# Altium PCB PCB3.PcbDoc
Units mm, origin at the board's own origin, x right, y up, seen from the top; angles counter-clockwise.
Board outline 83.75 x 55 mm, 2 copper layers (Top Layer, Bottom Layer); 54 components, 54 nets, 287 pads, 43 vias.
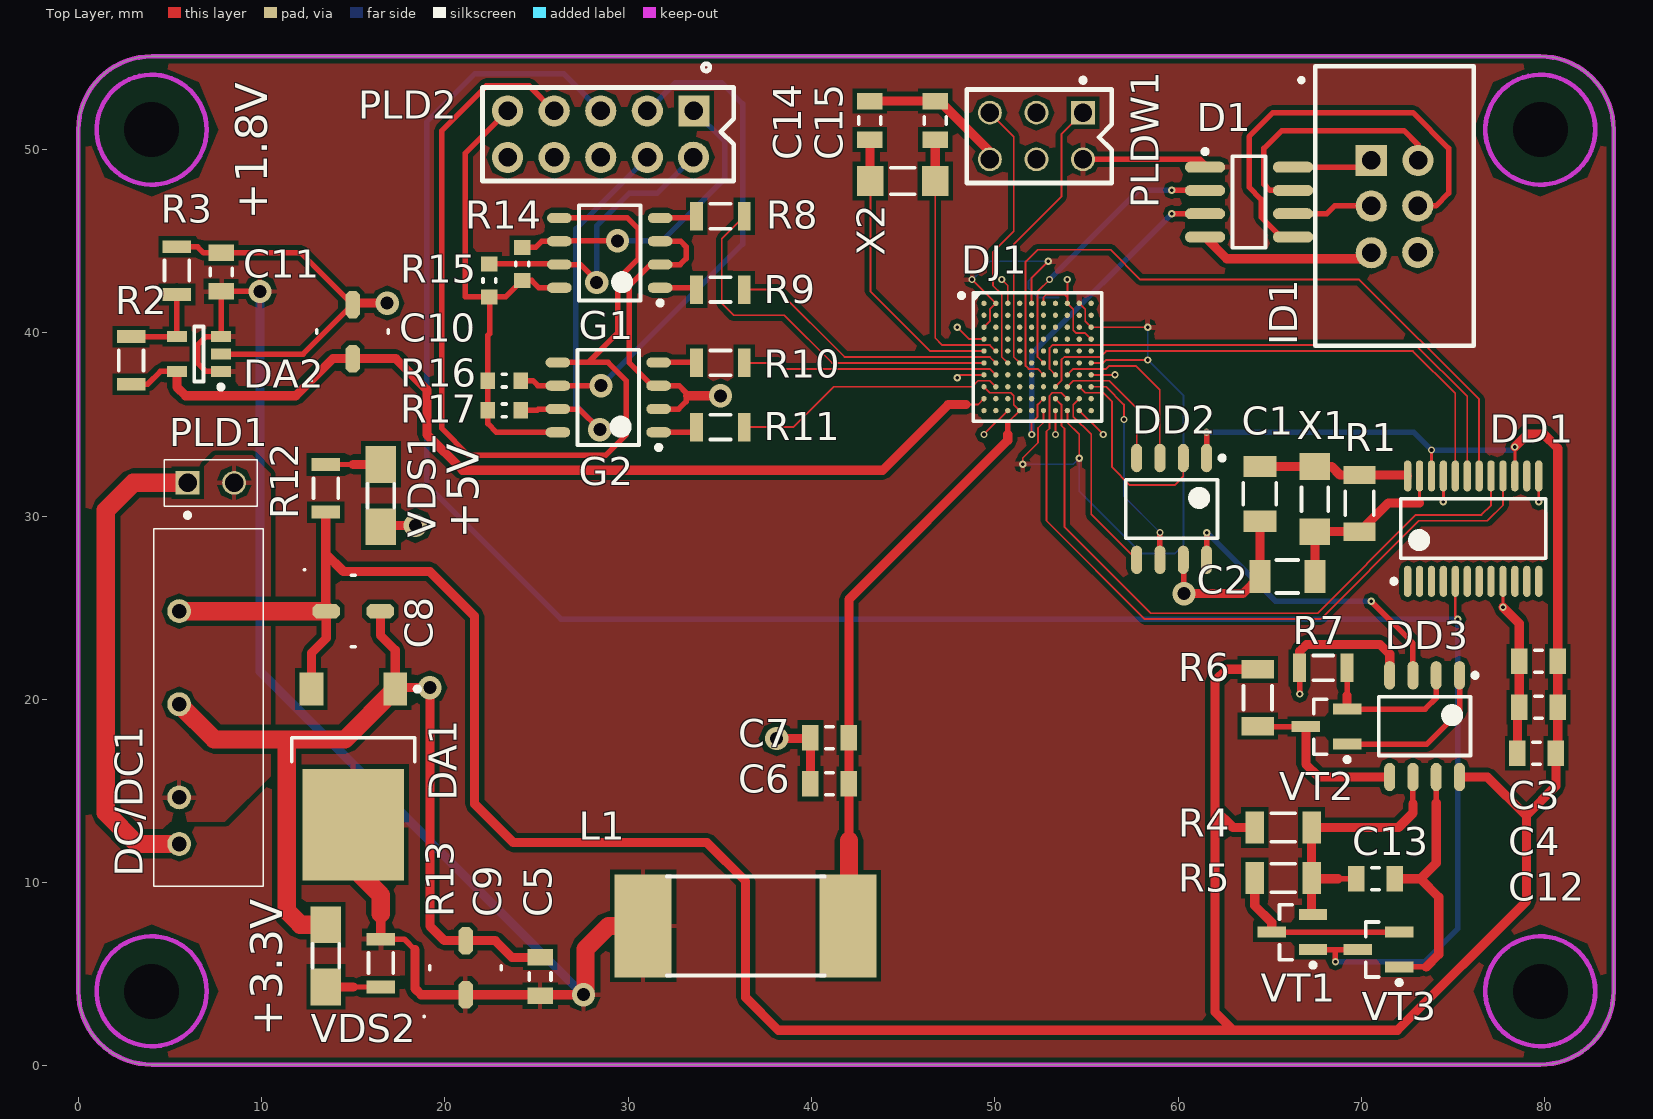
[diagram p0: Top Layer view]
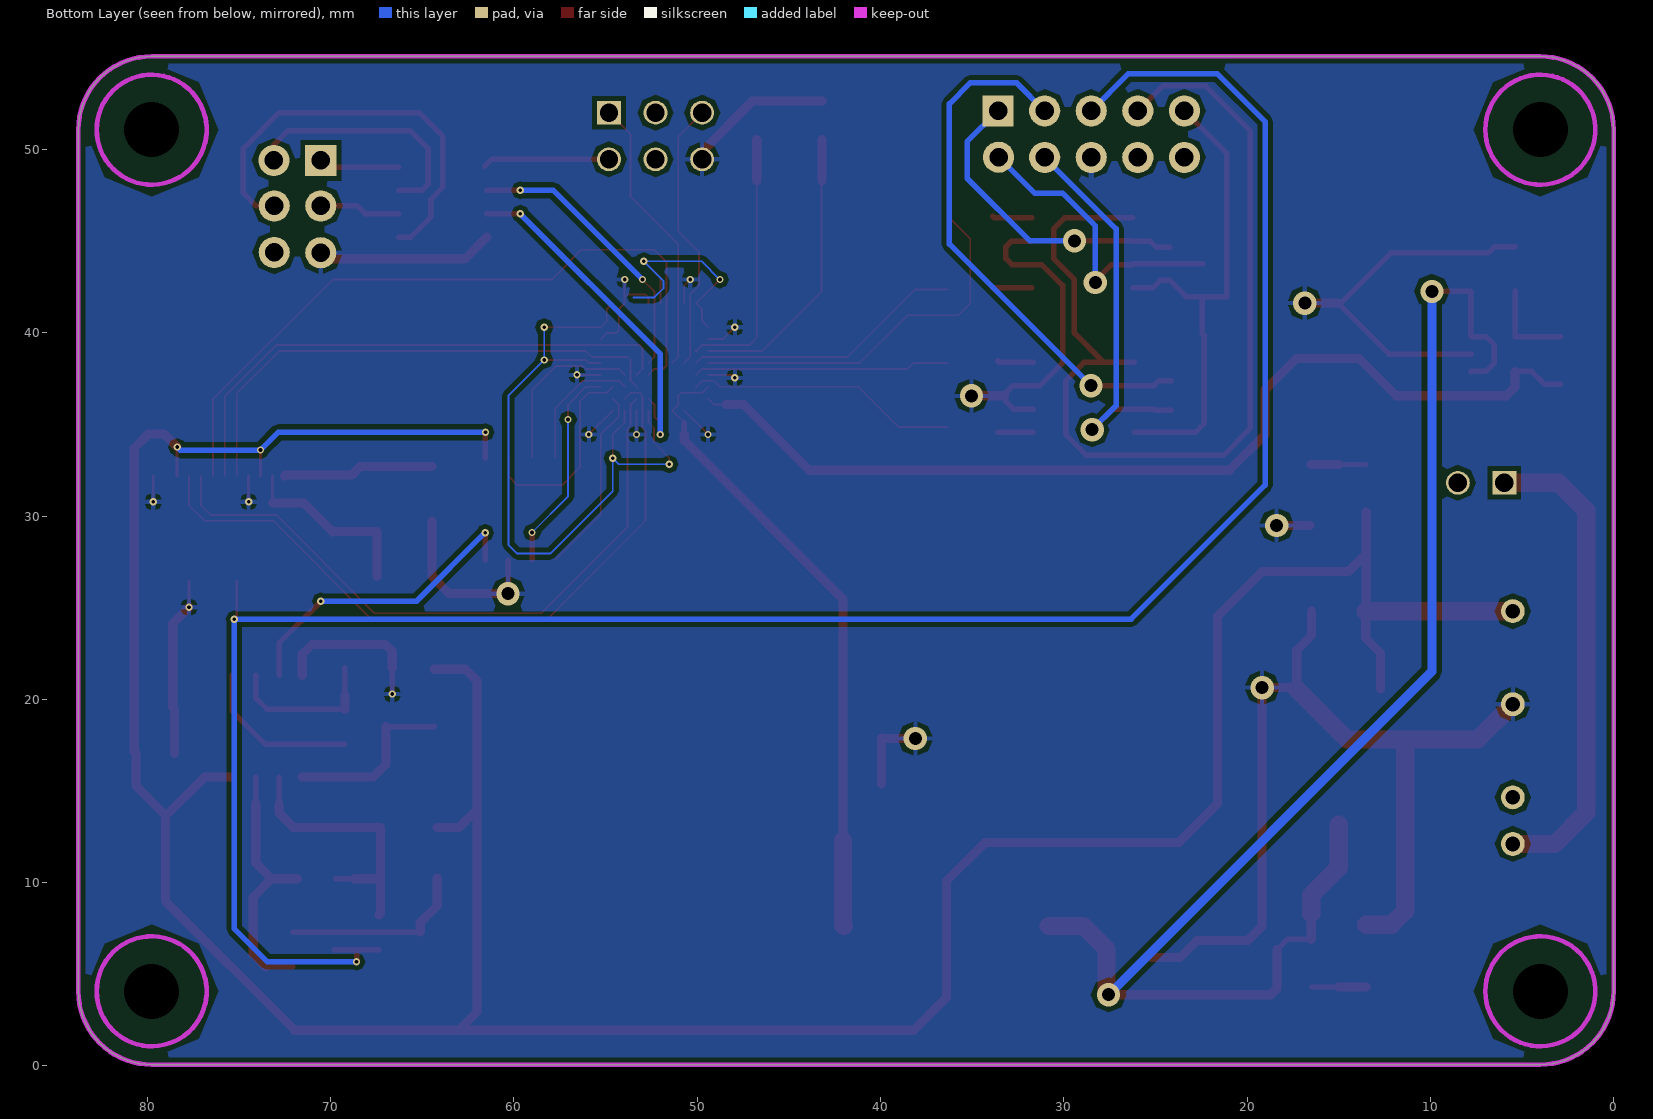
[diagram p1: Bottom Layer view, seen from below]

## Layer stack, top to bottom
Top Solder: solder mask 0.0102, Solder Resist, Dk 3.5
Top Layer: signal copper 0.0356
Dielectric 1: dielectric 0.32, FR-4, Dk 4.8
Bottom Layer: signal copper 0.0356
Bottom Solder: solder mask 0.0102, Solder Resist, Dk 3.5

## Board outline
0,4.075 0,51.075 cw(c4,51.075) 4,55.075 79.75,55.075 cw(c79.75,51.075) 83.75,51.075 83.75,4.075 cw(c79.75,4.075) 79.75,0.075 4,0.075 cw(c4,4.075)

## Design rules (kind name [scope] priority, off if disabled: settings)
Clearance [All] p1: gap=0.254 ignorepadtopadclearanceinfootprint=FALSE except(0: Arc-Hole Track-Hole SMDPad-Hole THPad-Hole Via-Hole Fill-Hole Poly-Hole Region-Hole Text-Hole; 0.1: Arc-Arc Arc-Track Arc-SMDPad Arc-Via Track-Track Track-SMDPad Track-Via Via-Via)
PolygonConnect [All] p1: connectstyle=Relief reliefconductorwidth=0.254 reliefentries=4 polygonreliefangle="90 Angle" airgapwidth=0.254
RoomDefinition Sheet4 [InComponentClass('Sheet4')] p1: confinementstyle=ConfineIn formatcopy=TRUE lockcomponents=FALSE outline 0,8.5 8,8.5 8,0 0,0
RoutingVias [All] p1: holewidth=0.711 width=1.27 viastyle="Through Hole" minholewidth=0.2 minwidth=0.3 maxholewidth=0.711 maxwidth=1.27
SolderMaskExpansion [All] p1: expansion=0.102
Width [All] p1: maxlimit=2 minlimit=0.1 preferedwidth=0.3
30 further rules are at their usual default settings.

## Components (designator, comment, footprint, x,y, rotation, side; value= is the part's Value field where it differs from the comment)
C1 "33pF" "CAP 1206" 64.45,31.213 r270 top
C2 "33pF" "CAP 1206" 65.95,26.7 r180 top
C3 "100pF" "CAP 0805" 79.65,22.075 r180 top
C4 "100nF" "CAP 0805" 79.65,19.575 r180 top
C5 "100nF" "CAP 0805" 25.188,4.875 r270 top
C6 "100nF" "CAP 0805" 40.987,15.4 r0 top
C7 "100nF" "CAP 0805" 40.987,17.9 r0 top
C8 "10mF" "CAP 10MF ELECTROLIT" 15,24.813 r0 top
C9 "10mF" "CAP 10MF ELECTROLIT" 21.125,5.362 r90 top
C10 "10mF" "CAP 10MF ELECTROLIT" 14.963,40.063 r90 top
C11 "100nF" "CAP 0805" 7.8,43.3 r270 top
C12 "100pF" "CAP 0805" 79.55,17.063 r0 top
C13 "100pF" "CAP 0805" 70.763,10.213 r0 top
C14 "16pF" "CAP 0805" 43.165,51.587 r270 top
C15 "16pF" "CAP 0805" 46.74,51.588 r270 top
D1 "ADM3488" ADM3488 63.863,47.125 r0 top
DA1 "" MC33269 15,15.813 r270 top
DA2 "" MIC5205-ADJ 6.575,38.837 r180 top
DC/DC1 "" "TRACO POWER" 10.1,9.812 r90 top
DD1 "AD7709" "AD7709 TSSOP24" 76.087,29.313 r90 top
DD2 "AD8300" SOIC8 59.638,30.388 r270 top
DD3 "OP284" SOIC8 73.438,18.538 r270 top
DJ1 "ATXMEGA128A1" ATXMEGA128A1 52.325,38.675 r0 top
G1 "" "HCPL-0600/01/11/30/31/61 (HCPL-0631-000E)" 28.988,44.355 r180 top
G2 "" "HCPL-0600/01/11/30/31/61 (HCPL-0631-000E)" 28.907,36.472 r180 top
ID1 "IDC6" "IDC 6" 71.795,46.92 r270 top
L1 "" "IND 10 MHE" 36.4,7.638 r0 top
PLD1 "" "PLS 2" 4.69,30.543 r0 top
PLD2 "PLD 10" "PLD 10" 34.848,53.372 r180 top
PLDW1 "PLD 6 SPI" "PLD 6 SPI" 56.075,53.27 r180 top
R1 "1MOm" "RES 1206" 69.887,30.687 r90 top
R2 "220kOm" "RES 0805" 2.875,38.488 r270 top
R3 "100kOm" "RES 0805" 5.375,43.387 r270 top
R4 "51Om" "RES 1206" 65.725,13.013 r180 top
R5 "10kOm" "RES 1206" 65.725,10.25 r0 top
R6 "2.37kOm" "RES 1206" 64.337,20.088 r90 top
R7 "4.7kOm" "RES 0805" 67.912,21.713 r0 top
R8 "" "RES 0805" 35.025,46.35 r0 top
R9 "" "RES 0805" 35.025,42.35 r0 top
R10 "" "RES 0805" 35.025,38.35 r0 top
R11 "" "RES 0805" 35.025,34.85 r0 top
R12 "110Om" "RES 0805" 13.5,31.512 r270 top
R13 "27Om" "RES 0805" 16.5,5.613 r270 top
R14 "1kOm" "CAP 0603" 24.213,43.75 r270 top
R15 "1kOm" "CAP 0603" 22.425,42.85 r270 top
R16 "1kOm" "CAP 0603" 23.238,37.387 r180 top
R17 "1kOm" "CAP 0603" 23.238,35.762 r180 top
VDS1 "2.8V 20mA" "Под диод (5ммх2мм)" 15.3,34.012 r270 top
VDS2 "2.8V 20mA" "Под диод (5ммх2мм)" 14.7,3.113 r90 top
VT1 "2Т664А9" 2Т3129Б9 66.225,7.3 r180 top
VT2 "2Т3130Б9" 2Т3129Б9 68.088,18.513 r180 top
VT3 "2Т3129Б9" 2Т3129Б9 70.925,6.35 r180 top
X1 "32.768kHz" KVARZ 67.45,30.925 r90 top
X2 "32.768kHz" KVARZ 44.978,48.275 r0 top

## Footprints (in the part's own frame and the unit in brackets; to place one, negate y for a bottom-side part, rotate by r counter-clockwise, add the part's x,y. Pads: shape width x height; smd on the part's side, far side on the other; paste and mask are expansions set on the pad)
2Т3129Б9 [mm]
  rect 1.55x0.6 smd: 1(-1.125,0.95) 2(1.125,0) 3(-1.125,-0.95)
  silkscreen extent -1.25,-1.5 0.7,1.92, body extent -0.7,-1.5 0.7,1.5, height 1
"AD7709 TSSOP24" [mm]
  oval 1.7x0.4 smd: 1(-2.875,3.575) 2(-2.875,2.925) 3(-2.875,2.275) 4(-2.875,1.625) 5(-2.875,0.975) 6(-2.875,0.325) 7(-2.875,-0.325) 8(-2.875,-0.975) 9(-2.875,-1.625) 10(-2.875,-2.275) 11(-2.875,-2.925) 12(-2.875,-3.575) 13(2.875,-3.575) 14(2.875,-2.925) 15(2.875,-2.275) 16(2.875,-1.625) 17(2.875,-0.975) 18(2.875,-0.325) 19(2.875,0.325) 20(2.875,0.975) 21(2.875,1.625) 22(2.875,2.275) 23(2.875,2.925) 24(2.875,3.575)
  silkscreen extent -3,-3.95 1.63,4.45, body extent -2.25,-3.95 2.25,3.95, height 1.2
ADM3488 [mm] "SOIC, 8-Leads, Body 4,90x3,90mm, Pitch 1,27mm, IPC Medium Density"
  oval 2.2x0.6 smd: 1(-2.4,1.905) 2(-2.4,0.635) 3(-2.4,-0.635) 4(-2.4,-1.905) 5(2.4,-1.905) 6(2.4,-0.635) 7(2.4,0.635) 8(2.4,1.905)
  silkscreen extent -2.52,-2.5 0.9,2.88, body extent -2,-2.5 2,2.5, height 1.75
ATXMEGA128A1 [mm] "BGA, 100-Leads, Body 7,00x7,00mmx1,00mm, Pitch 0,65mm"
  round 0.29 smd: A1(-2.925,2.925) A2(-2.275,2.925) A3(-1.625,2.925) A4(-0.975,2.925) A5(-0.325,2.925) A6(0.325,2.925) A7(0.975,2.925) A8(1.625,2.925) A9(2.275,2.925) A10(2.925,2.925) B1(-2.925,2.275) B2(-2.275,2.275) B3(-1.625,2.275) B4(-0.975,2.275) B5(-0.325,2.275) B6(0.325,2.275) B7(0.975,2.275) B8(1.625,2.275) B9(2.275,2.275) B10(2.925,2.275) C1(-2.925,1.625) C2(-2.275,1.625) C3(-1.625,1.625) C4(-0.975,1.625) C5(-0.325,1.625) C6(0.325,1.625) C7(0.975,1.625) C8(1.625,1.625) C9(2.275,1.625) C10(2.925,1.625) D1(-2.925,0.975) D2(-2.275,0.975) D3(-1.625,0.975) D4(-0.975,0.975) D5(-0.325,0.975) D6(0.325,0.975) D7(0.975,0.975) D8(1.625,0.975) D9(2.275,0.975) D10(2.925,0.975) E1(-2.925,0.325) E2(-2.275,0.325) E3(-1.625,0.325) E4(-0.975,0.325) E5(-0.325,0.325) E6(0.325,0.325) E7(0.975,0.325) E8(1.625,0.325) E9(2.275,0.325) E10(2.925,0.325) F1(-2.925,-0.325) F2(-2.275,-0.325) F3(-1.625,-0.325) F4(-0.975,-0.325) F5(-0.325,-0.325) F6(0.325,-0.325) F7(0.975,-0.325) F8(1.625,-0.325) F9(2.275,-0.325) F10(2.925,-0.325) G1(-2.925,-0.975) G2(-2.275,-0.975) G3(-1.625,-0.975) G4(-0.975,-0.975) G5(-0.325,-0.975) G6(0.325,-0.975) G7(0.975,-0.975) G8(1.625,-0.975) G9(2.275,-0.975) G10(2.925,-0.975) H1(-2.925,-1.625) H2(-2.275,-1.625) H3(-1.625,-1.625) H4(-0.975,-1.625) H5(-0.325,-1.625) H6(0.325,-1.625) H7(0.975,-1.625) H8(1.625,-1.625) H9(2.275,-1.625) H10(2.925,-1.625) J1(-2.925,-2.275) J2(-2.275,-2.275) J3(-1.625,-2.275) J4(-0.975,-2.275) J5(-0.325,-2.275) J6(0.325,-2.275) J7(0.975,-2.275) J8(1.625,-2.275) J9(2.275,-2.275) J10(2.925,-2.275) K1(-2.925,-2.925) K2(-2.275,-2.925) K3(-1.625,-2.925) K4(-0.975,-2.925) K5(-0.325,-2.925) K6(0.325,-2.925) K7(0.975,-2.925) K8(1.625,-2.925) K9(2.275,-2.925) K10(2.925,-2.925)
  silkscreen extent -4.27,-3.5 3.5,3.5, body extent -3.5,-3.5 3.5,3.5, height 1
"CAP 10MF ELECTROLIT" [mm]
  oct 1.5x0.8 smd: 1(-1.475,0) 2(1.475,0)
  silkscreen extent -2.71,-1.95 0.1,2.31, body extent -2,-2 2,2, height 5.4
"CAP 0603" [mm]
  rect 0.8x0.9 smd: 1(-0.9,0) 2(0.9,0)
  silkscreen extent -0.1,-0.35 0.1,0.35, body extent -0.8,-0.4 0.8,0.4, height 0.9
"CAP 0805" [mm]
  rect 0.9x1.4 smd: 1(-1.05,0) 2(1.05,0)
  silkscreen extent -0.2,-0.6 0.2,0.6, body extent -1,-0.63 1,0.63, height 1.3
"CAP 1206" [mm]
  rect 1.15x1.8 smd: 1(-1.5,0) 2(1.5,0)
  silkscreen extent -0.6,-0.9 0.6,0.9
"HCPL-0600/01/11/30/31/61 (HCPL-0631-000E)" [mm] "Small-Outline SO-8 Package (HCPL-0600/01/11/30/31/61)"
  oval 1.35x0.55 smd: 1(-2.75,1.905) 2(-2.75,0.635) 3(-2.75,-0.635) 4(-2.75,-1.905) 5(2.75,-1.905) 6(2.75,-0.635) 7(2.75,0.635) 8(2.75,1.905)
  silkscreen extent -2.88,-2.6 1.68,2.85, body extent -2.05,-2.6 2.05,2.6, height 3.3
"IDC 6" [mm]
  rect 1.7x1.7 hole 1: 1(-2.48,-1.27)
  round 1.7 hole 1: 2(-2.48,1.29) 3(0,-1.27) 4(0,1.27) 5(2.56,-1.27) 6(2.54,1.27)
  silkscreen extent -7.62,-5.18 7.64,4.32, body extent -7.61,-4.4 7.61,4.4, height 9
"IND 10 MHE" [mm]
  rect 3.1x5.6 smd: 1(-5.59,0) 2(5.59,0)
  silkscreen extent -4.3,-2.7 4.3,2.7, body extent -6,-6 6,6, height 0.6
KVARZ [mm]
  rect 1.45x1.65 smd: 1(-1.775,0) 2(1.775,0)
  silkscreen extent -0.65,-0.72 0.65,0.72, body extent -2.1,-0.8 2.1,0.8, height 0.85
MC33269 [mm] "D-PAK, 3-Pads, Body 6,27x6,73mm (max), IPC Medium Density"
  rect 1.8x1.3 smd: 1(-4.75,2.29) 3(-4.75,-2.29)
  rect 6.1x5.55 smd: 4(2.65,0)
  silkscreen extent -4.87,-3.35 -0.8,3.62, body extent -2.1,-3.37 4.25,3.37, height 0.58
MIC5205-ADJ [mm] "SOT23, 5-Leads, Body 2,91x2,80mm, Pitch 0,95mm, IPC Medium Density"
  rect 1.1x0.6 smd: 1(-1.2,0.95) 2(-1.2,0) 3(-1.2,-0.95) 4(1.2,-0.95) 5(1.2,0.95)
  silkscreen extent -1.33,-1.5 0.25,1.92, body extent -0.87,-1.51 0.87,1.51, height 1.45
"PLD 6 SPI" [mm]
  rect 1.3x1.3 hole 1: 1(1.27,1.27)
  round 1.3 hole 1: 2(1.27,3.81) 3(3.81,1.27) 4(3.81,3.81) 5(6.35,1.27) 6(6.35,3.81)
  silkscreen extent -0.3,-0.62 7.62,5.1, body extent 0,0.04 7.62,5.04, height 8.8
"PLD 10" [mm]
  rect 1.7x1.7 hole 1: 1(1.27,1.27)
  round 1.7 hole 1: 2(1.3,3.8) 3(3.81,1.27) 4(3.81,3.81) 5(6.35,1.27) 6(6.35,3.81) 7(8.89,1.27) 8(8.89,3.81) 9(11.43,1.27) 10(11.43,3.81)
  silkscreen extent -0.9,-1.3 12.8,5.1
"PLS 2" [mm]
  rect 1.3x1.3 hole 1: 1(1.27,1.27)
  round 1.3 hole 1: 2(3.81,1.27)
  silkscreen extent 0,-0.62 5.08,2.54, body extent 0.04,0 5.04,2.54, height 8.8
"RES 0805" [mm]
  rect 0.7x1.55 smd: 1(-1.3,0) 2(1.3,0)
  silkscreen extent -0.55,-0.67 0.55,0.67, body extent -1,-0.6 1,0.6, height 0.5
"RES 1206" [mm]
  rect 1x1.75 smd: 1(-1.55,0) 2(1.55,0)
  silkscreen extent -0.65,-0.77 0.65,0.77, body extent -1.6,-0.85 1.6,0.85, height 0.6
SOIC8 [mm] "SOIC, 8-Leads, Body 5,00x4,00mm, Pitch 1,27mm, IPC Medium Density"
  oval 1.55x0.6 smd: 1(-2.775,1.905) 2(-2.775,0.635) 3(-2.775,-0.635) 4(-2.775,-1.905) 5(2.775,-1.905) 6(2.775,-0.635) 7(2.775,0.635) 8(2.775,1.905)
  silkscreen extent -2.9,-2.5 1.6,2.88
"TRACO POWER" [mm]
  round 1.3 hole 0.8: 1(2.3,4.6) 2(4.84,4.6) 4(9.92,4.6) 6(15,4.6)
  silkscreen extent 0,0 19.5,6
"Под диод (5ммх2мм)" [mm]
  rect 2x1.65 smd: 1(1.2,1.2) 2(4.6,1.2)
  silkscreen extent 2.25,0.48 3.55,1.93, body extent 0.8,0.4 5,2, height 0.85

## Part data
C1 C2: library part "Cap 33pF"
C3: library part "Cap 100 pF"
C4 C5 C6 C7 C11: library part "cap 100nF"
C8 C9 C10: library part "Cap 10mF electrolit"
C12 C13: library part "Cap 100pF"
C14 C15: library part "Cap 22pF"
DA1: library part MC33269
DA2: library part MIC5205-ADJ
DC/DC1: library part "TRACO POWER(5V)"
G1 G2: library part Оптопара
L1: library part "Ind 10 mHe"
PLD1: library part "PLS 2"
R1: library part "RES 1MOm"
R2 R3: library part "Res 100kOm"
R4: library part "RES 51Om"
R5: library part "RES 10kOm SMD1206"
R6: library part "RES 2.37kOm"
R7: library part "RES 4.6kOm"
R8 R9 R10 R11: library part "Res 100 Om"
R12: library part "Res 110Om"
R13: library part "Res 25Om"
R14 R15 R16 R17: library part "Res 1kOm"
VDS1 VDS2: library part Светодиод

## Free pads (board coordinates)
  round 0 hole 3: m/h(4,4.075) m/h(4,51.075) m/h(79.75,4.075) m/h(79.75,51.075)

## Via types
v1: diameter 0.4, hole 0.2, Top Layer to Bottom Layer, 31 vias
v2: diameter 1.27, hole 0.711, Top Layer to Bottom Layer, 12 vias

## Nets (pads, with @x,y where several pads share a name; then routed paths per layer and width w, separated by ;. In a path a pad name is that pad's centre, name@x,y a point inside that pad or via, vN(x,y) a via of type N, cw(c..) or ccw(c..) an arc to the next point about the centre after c; other vN are vias at no path point)
+5V: C3.1 C4.1 C8.1 C12.2 DA1.3 DC/DC1.6 DD1.15 DD1.22 DD2.1 DD3.8 R4.2 R6.2 R12.2 | length 186.1
  Top Layer w0.15: DD1.22 v1(73.812,33.6) ; DD1.15 v1(78.362,33.763)
  Top Layer w0.3: DD2.1 v1(61.543,34.575)
  Top Layer w0.5: DA1.3 12.71,22.523 13.525,23.338 C8.1 13.5,24.838 13.5,27.938 ; 13.487,27.95 13.5,27.938 ; R12.2 13.5,27.938 ; R4.2 62.987,13.013 62,14 ; R6.2 62.638,21.638 62,21 62,14 ; DD3.8 76.863,15.762 78.975,13.65 ; v1(78.362,33.763) 79.075,34.475 79.925,34.475 80.7,33.7 C3.1 C4.1 80.7,17.162 C12.2 80.6,15.275 79,13.675 79,9 71.95,1.95 63,1.95 ; 13.5,27.938 14.462,26.975 19.175,26.975 21.612,24.537 21.612,14.3 23.725,12.187 34.288,12.187 36.4,10.075 36.4,3.737 38.187,1.95 63,1.95 ; 62,14 62,2.95 63,1.95
  Top Layer w1: DC/DC1.6 C8.1
  Bottom Layer w0.3: v1(61.543,34.575) 72.837,34.575 v1(73.812,33.6) 78.2,33.6 v1(78.362,33.763)
"+5V (Dirty)": DC/DC1.1 PLD1.1 | length 26.3
  Top Layer w1: DC/DC1.1 3.2,12.113 1.5,13.813 1.5,30.312 3,31.812 PLD1.1
AVCC: C6.2 C7.2 DJ1.H1 DJ1.K4 L1.2 | length 34.8
  Top Layer w0.1: DJ1.H1 49.725,36.725 50.862,36.725 51.025,36.562 51.025,36.075 DJ1.K4 50.7,35.1
  Top Layer w0.3: 50.7,34.45 50.7,35.1
  Top Layer w0.5: 42.038,12.3 C6.2 C7.2 42.037,25.462 50.7,34.125 50.7,34.45
  Top Layer w1: L1.2 42.038,7.685 42.038,12.3
CLR2: DD2.6 DJ1.H10 | length 11.5
  Top Layer w0.1: DJ1.H10 56.062,37.05 57.038,36.075 v1(57.038,35.262)
  Top Layer w0.3: DD2.6 v1(59.003,29.102)
  Bottom Layer w0.1: v1(57.038,35.262) 57.038,31.067 v1(59.003,29.102)
CP: DJ1.F2 R9.2 | length 15.4
  Top Layer w0.1: R9.2 38.125,42.35 41.8,38.675 49.725,38.675 DJ1.F2
Data: DJ1.F1 R8.2 | length 20.9
  Top Layer w0.1: R8.2 35.1,45.125 35.1,41.6 35.75,40.95 38.512,40.95 41.112,38.35 DJ1.F1
EO: DJ1.H2 R11.2 | length 14.9
  Top Layer w0.1: R11.2 39,34.85 41.2,37.05 48.75,37.05 49.075,37.375 49.725,37.375 DJ1.H2
GND: C1.2 C2.2 C3.2 C4.2 C5.1 C6.1 C7.1 C8.2 C9.2 C10.2 C11.1 C12.1 C14.1 C15.1 D1.4 DA1.1 DA2.2 DC/DC1.4 DD1.9 DD1.13 DD1.21 DD2.7 DD3.4 DJ1.A3 DJ1.A6 DJ1.A8 DJ1.D1 DJ1.D10 DJ1.G1 DJ1.G10 DJ1.K3 DJ1.K7 DJ1.K9 G1.2 G1.3 G2.2 G2.3 ID1.5 PLD2.6 PLDW1.6 R3.1 R7.1 VDS1.2 VDS2.2 | length 162.4
  Top Layer w0.1: v1(47.937,37.538) 48.1,37.7 DJ1.G1 ; v1(47.937,40.3) 48.587,39.65 DJ1.D1 ; v1(49.4,34.45) DJ1.K3 ; v1(50.375,42.9) 50.7,42.575 DJ1.A3 ; DJ1.A6 52.65,41.925 52.812,42.088 53.787,42.088 53.95,41.925 DJ1.A8 ; v1(53.3,34.45) DJ1.K7 ; v1(53.95,42.9) DJ1.A8 ; DJ1.K9 v1(55.9,34.45) ; DJ1.G10 v1(56.55,37.7) ; DJ1.D10 54.925,39.975 54.438,39.975 54.275,40.138 54.275,41.275 DJ1.A8
  Top Layer w0.15: v1(74.463,30.775) DD1.21 ; v1(77.713,25.025) DD1.9 ; v1(79.663,30.775) DD1.13
  Top Layer w0.3: R3.1 6.5,44.687 6.838,44.35 C11.1 12.15,44.35 C10.2 12.262,38.837 DA2.2 ; G2.2 32.75,35.837 33.15,36.238 33.15,36.725 32.768,37.107 G2.3 31.305,37.107 30.063,38.35 30.063,42.575 31.208,43.72 G1.2 32.83,43.72 33.15,44.04 33.15,44.688 32.848,44.99 G1.3 ; v2(60.31,25.765) DD2.7@60.31,27.575 ; v1(66.623,20.288) R7.1@66.623,21.723
  Top Layer w0.5: C10.2@15.038,41.613 v2(16.848,41.613) ; C8.2 16.475,23.5 17.29,22.685 DA1.1 17.365,20.638 v2(19.175,20.638) 19.175,7.637 19.975,6.837 C9.2 22.738,6.837 23.65,5.925 C5.1 ; VDS1.2@16.575,29.487 v2(18.385,29.487) ; 33.225,36.556 v2(35.035,36.556) ; v2(38.09,17.862) C7.1@39.9,17.862 ; C6.1 C7.1 ; C14.1 C15.1 46.975,52.638 49.725,49.887 PLDW1.6 ; v2(60.31,25.765) 63.515,25.765 C2.2 C1.2 ; D1.4 62.645,44.037 70.202,44.037 ID1.5 ; R7.1 66.623,21.723 66.623,22.622 67,23 71,23 71.532,22.468 DD3.4 ; v1(77.713,25.025) 78.6,24.137 C3.2 C4.2 ; C12.1 78.5,19.475 C4.2
  Top Layer w1: DC/DC1.4 7.42,17.812 11.375,17.812 ; VDS2.2 12.112,7.713 11.375,8.45 11.375,17.812 ; DA1.1 14.54,17.812 11.375,17.812
GND(Dirty): DC/DC1.2 PLD1.2
LD2: DD2.5 DJ1.J9 | length 10.4
  Top Layer w0.1: DJ1.J9 54.275,36.075 54.275,35.425 55.25,34.45 55.25,30.095 DD2.5
MISO1: DD1.19 DJ1.G7 | length 29.9
  Top Layer w0.1: DJ1.G7 52.975,38.025 52.975,39.163 53.137,39.325 72.962,39.325 75.762,36.525 DD1.19
MOSI1: DD1.20 DJ1.H7 | length 28.7
  Top Layer w0.1: DJ1.H7 53.625,37.375 53.625,38.513 53.787,38.675 55.737,38.675 56.062,39 72.8,39 75.113,36.687 DD1.20
MOSI2: DD2.4 DJ1.H8 | length 7.2
  Top Layer w0.1: DJ1.H8 54.275,37.375 56.225,37.375 57.733,35.868 DD2.4
NetC1_1: C1.1 DD1.24 R1.2 X1.2 | length 8.3
  Top Layer w0.5: C1.1@64.45,32.7 X1.2 68.363,32.7 68.825,32.238 R1.2 72.463,32.238 DD1.24
NetC2_1: C2.1 DD1.23 R1.1 X1.1 | length 10.3
  Top Layer w0.15: 73.163,30.712 DD1.23
  Top Layer w0.5: C2.1 X1.1 69.875,29.15 R1.1 71.463,30.712 73.163,30.712
NetC13_1: C13.1 DD3.6 R4.1 R5.2 VT1.3 | length 15.1
  Top Layer w0.3: 68.713,10.212 C13.1 ; 72.802,14.302 DD3.6
  Top Layer w0.5: VT1.3 67.275,8.325 R5.2 ; 68.713,10.212 67.313,10.212 R5.2 ; 72.802,14.302 72.802,13.802 72.013,13.013 R4.1 R5.2
NetC13_2: C13.2 DD3.7 VT3.1 | length 14.3
  Top Layer w0.3: VT3.1 73.525,5.4 ; 74.072,14.353 DD3.7
  Top Layer w0.5: C13.2 73.213,10.212 ; 73.525,5.4 74.213,6.087 74.213,9.212 73.213,10.212 ; 74.072,14.353 74.072,11.072 73.213,10.212
NetC14_2: C14.2 DJ1.E1 X2.1 | length 15.8
  Top Layer w0.1: X2.1 43.203,42.272 46.475,39 DJ1.E1
  Top Layer w0.5: X2.1@43.19,48.288 C14.2@43.19,50.537
NetC15_2: C15.2 DJ1.E2 X2.2 | length 14.4
  Top Layer w0.1: X2.2@46.74,48.288 46.74,39.71 47.125,39.325 49.725,39.325 DJ1.E2
  Top Layer w0.5: X2.2@46.74,48.288 C15.2
NetD1_5: D1.5 ID1.4 | length 23.5
  Top Layer w0.3: D1.5 65.605,45.22 64.525,46.3 64.525,47.275 63.863,47.937 63.863,50.7 65.163,52 72.8,52 74.75,50.05 74.75,47.612 74.058,46.92 ID1.4
NetD1_6: D1.6 ID1.3 | length 4.4
  Top Layer w0.3: D1.6 68.102,46.49 68.533,46.92 ID1.3
NetD1_7: D1.7 ID1.2 | length 13.7
  Top Layer w0.3: D1.7 65.015,47.76 64.675,48.1 64.675,50.05 65.65,51.025 72.313,51.025 73.085,50.253 ID1.2
NetD1_8: D1.8 ID1.1 | length 4.4
  Top Layer w0.3: D1.8 70.155,49.03 ID1.1
NetDA2_4: DA2.4 R2.1 R3.2 | length 5
  Top Layer w0.3: R2.1 DA2.4 R3.2@5.375,42.288
NetDD2_8: DD2.8 DD3.3 | length 17
  Top Layer w0.3: DD2.8@61.558,27.6 v1(61.558,29.09) ; v1(70.525,25.35) 72.802,23.073 DD3.3
  Bottom Layer w0.3: v1(61.558,29.09) 65.298,25.35 v1(70.525,25.35)
NetDD3_1: DD3.1 VT2.1 | length 8.8
  Top Layer w0.3: VT2.1 73.563,17.562 75.342,19.342 DD3.1
NetDD3_2: DD3.2 R7.2 VT2.3 | length 8.6
  Top Layer w0.3: VT2.3 73.463,19.463 74.072,20.072 DD3.2 ; 69.213,20.212 R7.2
  Top Layer w0.5: VT2.3 69.213,20.212
NetDD3_5: DD3.5 R6.1 VT2.2 | length 9.5
  Top Layer w0.3: R6.1 64.362,18.513 VT2.2
  Top Layer w0.5: VT2.2 66.963,16.462 67.663,15.762 DD3.5
NetG1_1: G1.1 R9.1 | length 2.1
  Top Layer w0.3: G1.1 R9.1@33.875,42.45
NetG1_4: G1.4 R8.1 | length 2.2
  Top Layer w0.3: G1.4 33.785,46.26 R8.1@33.875,46.35
NetG1_5: G1.5 G2.5 PLD2.7 | length 55.2
  Top Layer w0.3: PLD2.7 24.597,53.462 22.263,53.462 19.825,51.025 19.825,34.775 21.287,33.312 28.763,33.312 29.9,34.45 29.9,37.375 28.898,38.377 27.815,38.377 ; G2.5 27.815,38.377 ; G1.5 29.952,46.26 30.55,45.662 30.55,44.037 29.412,42.9 29.412,39.975 27.815,38.377
NetG1_6: G1.6 PLD2.1 R14.1 | length 17
  Top Layer w0.3: R14.1 24.95,44.65 25.29,44.99 G1.6 26.26,45.012 v2(29.412,45.012)
  Bottom Layer w0.3: v2(29.412,45.012) 31.85,45.012 35.262,48.425 35.262,50.417 PLD2.1
NetG1_7: G1.7 PLD2.2 R15.1 | length 16.2
  Top Layer w0.2: G1.7@26.208,43.75 G1.7
  Top Layer w0.3: R15.1 G1.7@26.208,43.75 ; G1.7 27.395,43.72 28.275,42.84 v2(28.275,42.737)
  Bottom Layer w0.3: v2(28.275,42.737) 28.275,45.825 30.062,47.612 31.588,47.612 PLD2.2
NetG1_8: G1.8 G2.8 PLD2.9 R14.2 R15.2 R16.2 R17.2 | length 27.8
  Top Layer w0.3: R15.2 21.1,41.95 21.1,49.785 PLD2.9 ; G2.8 22.808,34.567 22.337,35.038 R17.2 R16.2 22.337,39.85 22.438,39.95 22.438,41.962 23.325,41.962 R14.2 24.725,42.85 25.125,42.45 G1.8
NetG2_1: G2.1 R11.1 | length 1.9
  Top Layer w0.3: G2.1 R11.1@33.607,34.567
NetG2_4: G2.4 R10.1 | length 2
  Top Layer w0.3: G2.4 33.518,38.377 R10.1@33.608,38.467
NetG2_6: G2.6 PLD2.3 R16.1 | length 29.4
  Top Layer w0.3: R16.1 24.79,37.387 25.07,37.107 G2.6 v2(28.513,37.107)
  Bottom Layer w0.3: v2(28.513,37.107) 36.237,44.832 36.237,52.487 35.1,53.625 32.56,53.625 PLD2.3
NetG2_7: G2.7 PLD2.4 R17.1 | length 21.8
  Top Layer w0.3: R17.1 25.025,35.762 25.1,35.837 G2.7 27.315,35.837 v2(28.445,34.708)
  Bottom Layer w0.3: v2(28.445,34.708) 27.137,36.015 27.137,45.662 PLD2.4
NetR5_1: R5.1 VT1.2 VT3.3 | length 10.3
  Top Layer w0.3: VT1.2 VT3.3
  Top Layer w0.5: R5.1 64.175,8.75 65.1,7.825 VT1.2
NetR12_1: R12.1 VDS1.1 | length 3
  Top Layer w0.254: R12.1 15,32.813
  Top Layer w0.5: 15,32.813 VDS1.1
NetR13_2: R13.2 VDS2.1 | length 3
  Top Layer w0.254: 15,4.313 R13.2
  Top Layer w0.5: VDS2.1 15,4.313
PDI: DJ1.F4 PLDW1.1 | length 15.4
  Top Layer w0.1: DJ1.F4 51.025,38.675 51.025,44.825 53.625,47.425 53.625,50.82 PLDW1.1
R_x: D1.2 DJ1.F6 | length 15.5
  Top Layer w0.1: DJ1.F6 52.325,38.675 52.325,42.25 v1(52.975,42.9)
  Top Layer w0.3: v1(59.638,47.775) D1.2@61.463,47.775
  Bottom Layer w0.3: v1(52.975,42.9) 57.85,47.775 v1(59.638,47.775)
RDY1: DD1.18 DJ1.G6 | length 39.4
  Top Layer w0.1: DJ1.G6 52.325,38.025 51.838,38.025 51.675,38.188 51.675,43.875 52.325,44.525 56.306,44.525 57.931,42.9 69.875,42.9 76.412,36.363 DD1.18
RESET: DJ1.F3 PLDW1.5 | length 15
  Top Layer w0.1: PLDW1.5 51.025,50.7 51.025,45.525 49.887,44.387 49.887,42.575 50.375,42.088 50.375,38.675 DJ1.F3
SCK1: DD1.16 DJ1.J8 | length 39.4
  Top Layer w0.1: DJ1.J8 53.625,36.725 53.137,36.725 52.975,36.562 52.975,34.775 52.813,34.613 52.813,29.737 58.175,24.375 67.763,24.375 73.125,29.737 76.863,29.737 77.713,30.588 DD1.16
SCK2: DD2.3 DJ1.G8 | length 9.5
  Top Layer w0.1: DJ1.G8 54.275,38.025 56.062,38.025 56.225,38.188 57.687,38.188 58.987,36.888 DD2.3@58.987,33.163
SS1: DD1.17 DJ1.J7 | length 36.5
  Top Layer w0.1: DJ1.J7 53.625,36.075 53.625,34.938 53.787,34.775 53.787,29.412 58.5,24.7 67.6,24.7 72.963,30.063 76.537,30.063 77.063,30.588 DD1.17
SS2: DD2.2 DJ1.H9 | length 11.2
  Top Layer w0.1: DJ1.H9 54.925,36.725 55.9,36.725 56.387,36.237 56.387,32.663 57.362,31.688 59.8,31.688 60.273,32.16 DD2.2
STR: DJ1.G2 R10.2 | length 14
  Top Layer w0.1: R10.2 38.187,38.35 38.512,38.025 49.725,38.025 DJ1.G2
T_x: D1.3 DJ1.J6 | length 19.2
  Top Layer w0.1: v1(52,34.45) 52,35.1 52.325,35.425 52.325,36.075 DJ1.J6
  Top Layer w0.3: v1(59.638,46.49) D1.3
  Bottom Layer w0.3: v1(52,34.45) 52,38.838 v1@59.645,46.482
"VCC 3.3": C5.2 C9.1 C11.2 D1.1 DA1.4 DA2.1 DA2.3 DJ1.A2 DJ1.A5 DJ1.A9 DJ1.C1 DJ1.C10 DJ1.F10 DJ1.K6 DJ1.K8 L1.1 PLDW1.2 R13.1 | length 141
  Top Layer w0.1: v1(48.75,42.9) DJ1.A2 49.725,41.275 49.725,40.625 DJ1.C1 ; v1(51.513,32.825) 51.513,33.166 52.35,34.004 52.35,34.8 52.65,35.1 DJ1.K6 ; DJ1.A5 52,43 v1(52.9,43.9) ; DJ1.K8 53.95,35.1 54.6,34.45 v1(54.6,33.15) ; DJ1.A9 54.925,41.275 54.925,40.625 DJ1.C10 v1(58.337,40.3) ; DJ1.F10 55.9,38.35 56.062,38.513 v1(58.338,38.513)
  Top Layer w0.3: DA2.1@7.8,37.863 DA2.1 6.963,37.887 6.5,38.35 6.5,39.325 6.963,39.788 DA2.3 7.8,39.813 C11.2 ; C11.2@7.825,42.225 7.85,42.25 v2(9.913,42.25) ; R13.1@16.5,6.912 17.788,6.912 18.363,6.338 ; PLDW1.2 61.203,49.46 D1.1@61.587,49.075
  Top Layer w0.5: R13.1@16.5,6.912 16.5,8.313 ; 18.363,6.338 18.363,4.225 18.7,3.888 C9.1 ; C9.1@21.163,3.888 v2(27.55,3.888)
  Top Layer w1: DA1.4 15,10.812 16.5,9.313 16.5,8.313 ; v2@27.662,4 27.662,6.375 28.925,7.638 L1.1
  Bottom Layer w0.1: v1(48.75,42.9) 49.75,43.9 v1(52.9,43.9) 51.838,42.838 51.838,42.412 52.325,41.925 53.479,41.925 ; v1(51.513,32.825) 54.275,32.825 v1(54.6,33.15) 54.6,31.363 58.013,27.95 59.8,27.95 60.287,28.437 60.287,36.563 v1(58.338,38.513) v1(58.337,40.3)
  Bottom Layer w0.5: v2(9.913,42.25) 9.913,21.525 v2(27.55,3.888)
VREF-1.8: C10.1 DA2.5 DJ1.J1 R2.2 | length 54.3
  Top Layer w0.1: 48.425,36.075 49.075,36.075 DJ1.J1
  Top Layer w0.3: R2.2 3.775,37.188 4.475,37.887 DA2.5
  Top Layer w0.5: DA2.5 5.375,37.037 5.85,36.562 11.862,36.562 13.888,38.588 C10.1 17.312,38.588 19.012,36.888 19.012,34.45 20.963,32.5 43.875,32.5 47.45,36.075 48.425,36.075
X1: DD1.5 PLD2.5 VT1.1 VT3.2 | length 120
  Top Layer w0.15: DD1.5 75.113,24.5 v1(75.238,24.375)
  Top Layer w0.3: VT1.1 68.575,6.35 ; v1(68.575,5.687) 68.575,6.35 ; VT3.2 68.575,6.35
  Bottom Layer w0.3: PLD2.5 26.487,54.113 21.612,54.113 19.012,51.513 19.012,31.688 26.325,24.375 v1(75.238,24.375) 75.238,7.475 73.45,5.687 v1(68.575,5.687)
pads on no net: DD1.1 DD1.2 DD1.3 DD1.4 DD1.6 DD1.7 DD1.8 DD1.10 DD1.11 DD1.12 DD1.14 DJ1.A1 DJ1.A4 DJ1.A7 DJ1.A10 DJ1.B1 DJ1.B2 DJ1.B3 DJ1.B4 DJ1.B5 DJ1.B6 DJ1.B7 DJ1.B8 DJ1.B9 DJ1.B10 DJ1.C2 DJ1.C3 DJ1.C4 DJ1.C5 DJ1.C6 DJ1.C7 DJ1.C8 DJ1.C9 DJ1.D2 DJ1.D3 DJ1.D4 DJ1.D5 DJ1.D6 DJ1.D7 DJ1.D8 DJ1.D9 DJ1.E3 DJ1.E4 DJ1.E5 DJ1.E6 DJ1.E7 DJ1.E8 DJ1.E9 DJ1.E10 DJ1.F5 DJ1.F7 DJ1.F8 DJ1.F9 DJ1.G3 DJ1.G4 DJ1.G5 DJ1.G9 DJ1.H3 DJ1.H4 DJ1.H5 DJ1.H6 DJ1.J2 DJ1.J3 DJ1.J4 DJ1.J5 DJ1.J10 DJ1.K1 DJ1.K2 DJ1.K5 DJ1.K10 ID1.6 PLD2.8 PLD2.10 PLDW1.3 PLDW1.4

## Polygon pours and split planes (outlines as drawn)
GND(Dirty) on Top Layer "GND(DIRTY)_L01_P004" (solid, remove dead copper, pour order 4): 1.5,30.312 3,31.812 5.96,31.812 7.46,33.313 9.5,33.313 10.5,32.313 10.5,15.813 8,13.313 5,13.313 4.5,12.813 4.5,12.113 3.2,12.113 1.5,13.813
"VCC 3.3" on Top Layer "VCC_3.3_L01_P026" (solid, remove dead copper, pour order 26): 0,55 0,0 84,0 84,55
GND on Bottom Layer "GND_L02_P028" (solid, remove dead copper, pour order 28): 0,55 0,0 84,0 84,55

## Keep-outs
Keep-Out Layer:
  circle w0.254: c79.75,4.075 r3
  circle w0.254: c4,4.075 r3
  circle w0.254: c4,51.075 r3
  circle w0.254: c79.75,51.075 r3
  lines w0.254: 0,4.075 ccw(c4,4.075) 4,0.075 79.75,0.075 ccw(c79.75,4.075) 83.75,4.075 83.75,51.075 ccw(c79.75,51.075) 79.75,55.075 4,55.075 ccw(c4,51.075) 0,51.075 0,4.075

## Silkscreen, mask and mechanical layers (free items; w line width, h text height)
Top Overlay:
  text "+1.8V" at 10.887,46.15 h3 r90
  text "+5V" at 22.425,28.763 h3 r90
  text "+3.3V" at 11.7,1.625 h3 r90